# EAGLE board pickit_2 (EAGLE 5.11)
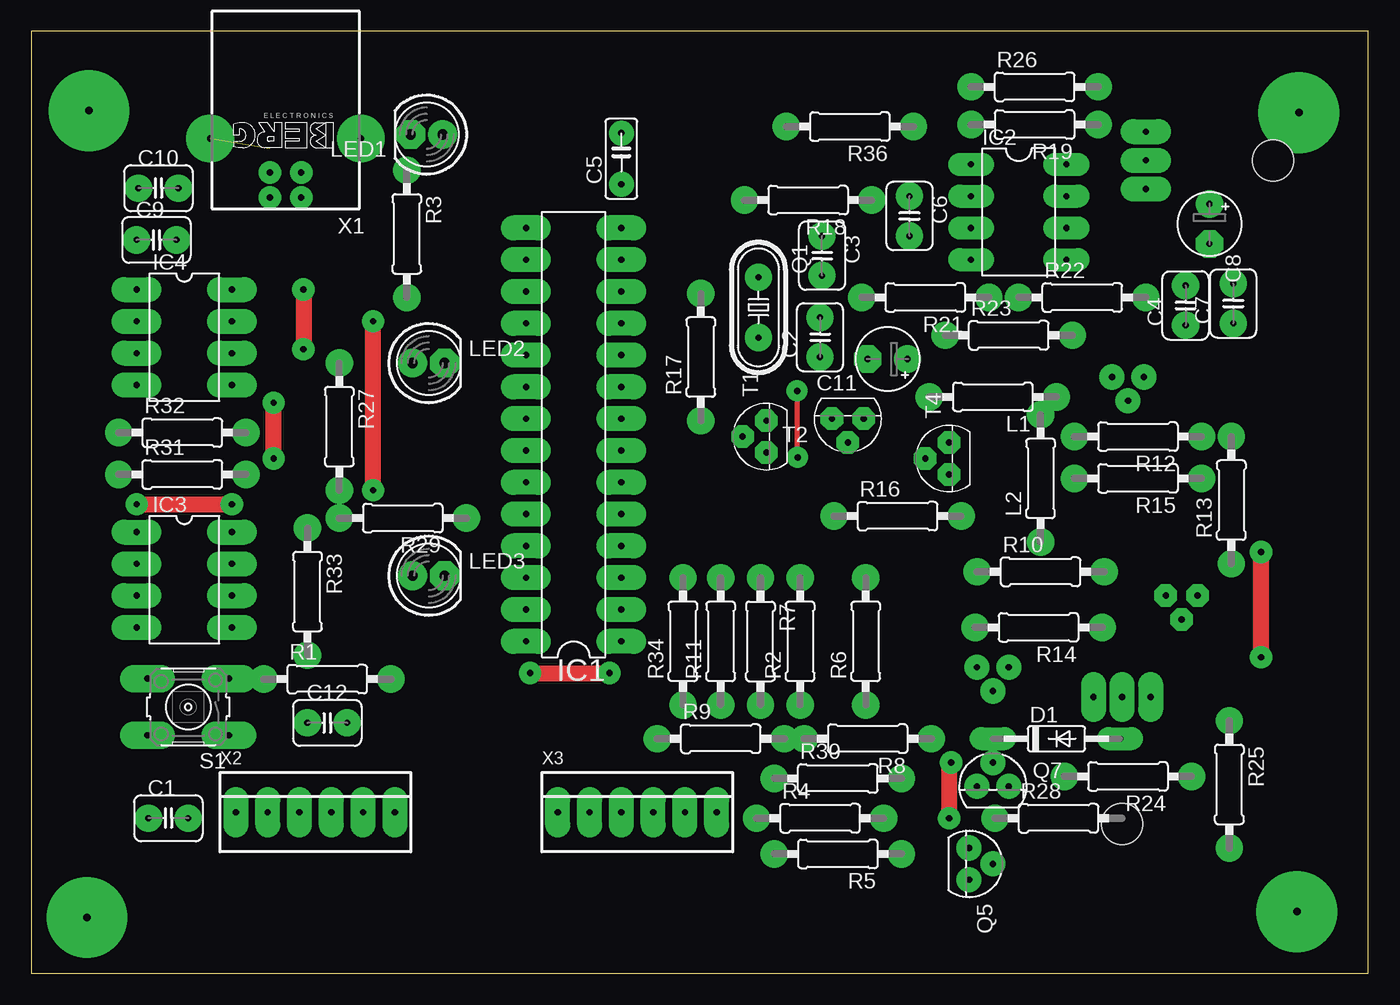
[diagram p0: board, top side]
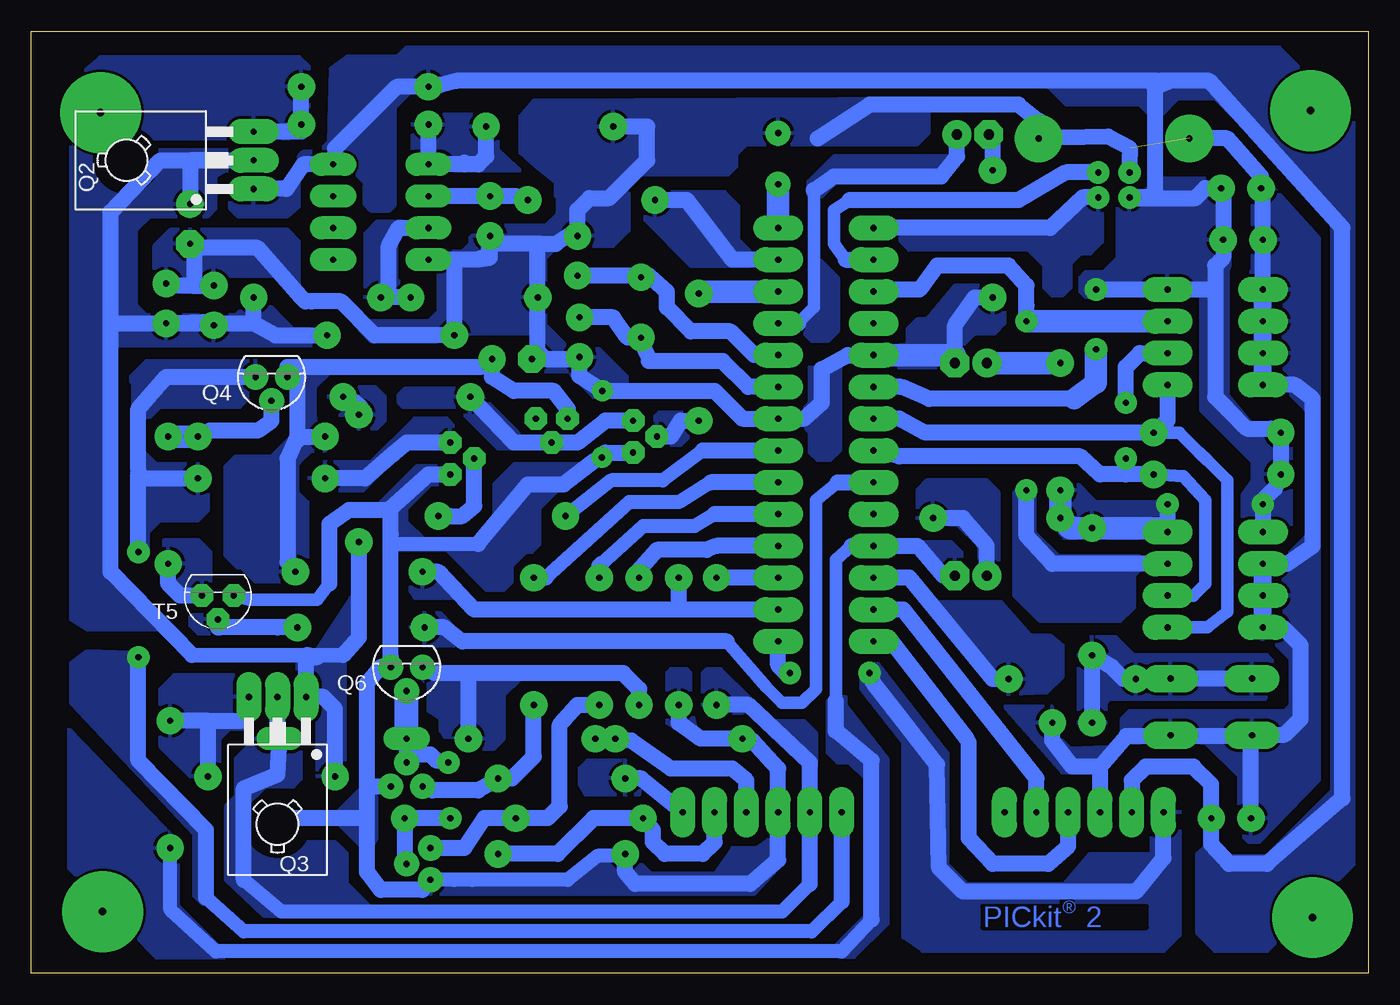
[diagram p1: board, bottom side, seen from below]

Size 106.83 x 75.24 mm. Coordinates in mm from the lower left corner, seen from the top.
Outline: 0,0 106.83,0 106.83,75.24 0,75.24 0,0
Copper layers (1*16): Top 0.035mm / dielectric 1.5mm / Bottom 0.035mm
Design rules "default": minimum track width 10mil, minimum drill 24mil, track to track 8mil, track to pad 8mil, pad to pad 8mil, via to via 8mil, smd to smd 8mil, copper to edge 40mil, drill to drill 8mil, minimum pad ring 10mil, minimum via ring 8mil, stop-mask expansion 4mil, vias tented up to drill 0mil, thermal gap 10mil

## Footprints (pad centres in the part's own frame; a part is rotated, then mirrored left to right if it is on the bottom)
C2.5-3 = drill 0.5 pad 2.184 round: 1 -1.587,0; 2 1.587,0
C5B2.5 = drill 0.5 pad 2 round: 1 -2.54,0; 2 1.54,0
E2,5-5 = drill 0.5 pad 2.184 round: + -1.587,0 | drill 0.5 pad 2.184 octagon: - 1.587,0
DO35-10 = drill 0.5 pad 1.85 long: A 5.08,0; C -5.08,0
DIL28-3 = drill 0.5 pad 2 long: 1 -16.51,-3.81; 2 -13.97,-3.81; 3 -11.43,-3.81; 4 -8.89,-3.81; 5 -6.35,-3.81; 6 -3.81,-3.81; 7 -1.27,-3.81; 8 1.27,-3.81; 9 3.81,-3.81; 10 6.35,-3.81; 11 8.89,-3.81; 12 11.43,-3.81; 13 13.97,-3.81; 14 16.51,-3.81; 15 16.51,3.81; 16 13.97,3.81; 17 11.43,3.81; 18 8.89,3.81; 19 6.35,3.81; 20 3.81,3.81; 21 1.27,3.81; 22 -1.27,3.81; 23 -3.81,3.81; 24 -6.35,3.81; 25 -8.89,3.81; 26 -11.43,3.81; 27 -13.97,3.81; 28 -16.51,3.81
DIL08 = drill 0.5 pad 1.85 long: 1 -3.81,-3.81; 2 -1.27,-3.81; 3 1.27,-3.81; 4 3.81,-3.81; 5 3.81,3.81; 6 1.27,3.81; 7 -1.27,3.81; 8 -3.81,3.81
DIL08' = drill 0.5 pad 2 long: 1 -3.81,-3.81; 2 -1.27,-3.81; 3 1.27,-3.81; 4 3.81,-3.81; 5 3.81,3.81; 6 1.27,3.81; 7 -1.27,3.81; 8 -3.81,3.81
0207/10 = drill 0.5 pad 2.184 round: 1 -5.08,0; 2 5.08,0
LED5MM = drill 0.813 pad 2.3 round: A -1.27,0 | drill 0.813 pad 2.3 octagon: K 1.27,0
HC49/S = drill 0.5 pad 2.184 round: 1 -2.413,0; 2 2.413,0
TO126 = drill 0.5 pad 2 long: 1 -2.286,-5.08; 2 0,-5.08; 3 2.286,-5.08 | hole 3.302: 0,5.08
TO92 = drill 0.5 pad 2 round: 1 1.27,0; 2 0,1.905; 3 -1.27,0
B3F-10XX = drill 0.5 pad 2.184 long: 1 -3.251,2.261; 2 3.251,2.261; 3 -3.251,-2.261; 4 3.251,-2.261
TO92' = drill 0.5 pad 1.8 octagon: 1 1.27,0; 2 0,1.905; 3 -1.27,0
PN61729-S = drill 0.5 pad 1.8 round: 1 1.25,4.71; 2 -1.25,4.71; 3 -1.25,2.71; 4 1.25,2.71 | drill 0.5 pad 3.81 round: S1 -6.02,0; S2 6.02,0
22-23-2061 = drill 0.5 pad 2 long: 1 -6.35,0; 2 -3.81,0; 3 -1.27,0; 4 1.27,0; 5 3.81,0; 6 6.35,0

## Placement (x,y rotation side)
C1  0.1uf  [C2.5-3]  10.95,12.38 0 top
C2  22pf  [C2.5-3]  63.02,50.8 90 top
C3  22pf  [C2.5-3]  63.18,57.31 270 top
C4  0.1uf  [C2.5-3]  92.23,53.34 90 top
C5  0.22uf or 0.47uf  [C5B2.5]  47.15,65.56 90 top
C6  0.1uf  [C2.5-3]  70.17,60.48 270 top
C7  0.1 uf  [C2.5-3]  96.04,53.5 90 top
C8  10uf  [E2,5-5]  94.14,59.85 270 top
C9  0.1uf  [C2.5-3]  10,58.58 0 top
C10  0.1uf  [C2.5-3]  10.16,62.71 0 top
C11  47uf  [E2,5-5]  68.42,49.05 180 top
C12  0.1uf  [C2.5-3]  23.65,20 0 top
D1  1N4148DO35-10  [DO35-10]  81.92,18.73 0 top
IC1  PIC18F2550_28DIP  [DIL28-3]  43.34,43.02 90 top
IC2  LM358N  [DIL08]  78.9,60.8 270 top
IC3  AT24CP  [DIL08']  12.22,31.43 270 top
IC4  AT24CP  [DIL08']  12.22,50.8 270 top
L1  330uh  [0207/10]  76.83,46.04 180 top
L2  330uh  [0207/10]  80.64,39.53 90 top
LED1  RED  [LED5MM]  31.59,66.99 180 top
LED2  GREEN  [LED5MM]  31.75,48.74 0 top
LED3  YELLOW  [LED5MM]  31.75,31.75 0 top
Q1  20mhz  [HC49/S]  58.1,53.18 270 top
Q2  BD140  [TO126]  94.14,64.93 90 bottom
Q3  BD140  [TO126]  87.15,16.99 180 bottom
Q4  2N3906  [TO92]  87.63,47.62 180 bottom
Q5  2N3906  [TO92]  74.93,8.73 270 top
Q6  2N3906  [TO92]  76.84,24.45 180 bottom
Q7  2N3906  [TO92]  76.83,14.92 0 top
R1  33R  [0207/10]  23.65,23.5 0 top
R2  10R  [0207/10]  61.44,26.51 90 top
R3  470R  [0207/10]  30,59.06 270 top
R4  33R  [0207/10]  63.02,12.38 0 top
R5  4.7k  [0207/10]  64.45,9.53 180 top
R6  10R  [0207/10]  66.67,26.51 90 top
R7  10R  [0207/10]  58.26,26.51 270 top
R8  33R  [0207/10]  66.83,18.73 180 top
R9  4.7K  [0207/10]  55.09,18.73 0 top
R10  8.2K  [0207/10]  80.65,32.07 0 top
R11  4.7K  [0207/10]  55.09,26.51 90 top
R12  100K  [0207/10]  88.42,42.86 180 top
R13  10K  [0207/10]  95.89,37.78 90 top
R14  10K  [0207/10]  80.49,27.62 180 top
R15  100R  [0207/10]  88.42,39.53 180 top
R16  10K  [0207/10]  69.22,36.51 0 top
R17  1K  [0207/10]  53.5,49.21 90 top
R18  10K  [0207/10]  62.07,61.75 180 top
R19  330R  [0207/10]  80.17,67.79 180 top
R21  100K  [0207/10]  71.44,53.98 180 top
R22  100K  [0207/10]  83.98,53.98 0 top
R23  100K  [0207/10]  78.11,50.96 0 top
R24  330R  [0207/10]  87.63,15.72 180 top
R25  1K  [0207/10]  95.73,15.08 270 top
R26  330R  [0207/10]  80.17,70.8 0 top
R27  470R  [0207/10]  24.61,43.66 270 top
R28  820R  [0207/10]  82.07,12.38 0 top
R29  470R  [0207/10]  29.69,36.35 180 top
R30  33R  [0207/10]  64.45,15.56 0 top
R31  2.7K  [0207/10]  12.06,39.85 0 top
R32  2.7K  [0207/10]  12.06,43.18 0 top
R33  10K  [0207/10]  22.07,30.48 270 top
R34  4.7K  [0207/10]  52.07,26.51 90 top
R36  240R  [0207/10]  65.41,67.63 180 top
S1  Program  [B3F-10XX]  12.54,21.27 180 top
T1  2N3904  [TO92']  58.74,42.86 90 top
T2  2N3904  [TO92']  65.25,44.29 180 top
T4  2N3904  [TO92']  73.34,41.12 90 top
T5  2N3904  [TO92']  91.92,30.16 180 bottom
X1  PN61729-S  [PN61729-S]  20.32,66.68 180 top
X2  ICSP  [22-23-2061]  22.7,12.86 0 top
X3  ICSP  [22-23-2061]  48.42,12.86 0 top

## Library data of the parts
C1-C7 C9 C10 C12 = capacitor-wima
C8 C11 L1 L2 R1-R19 R21-R34 R36 = rcl
D1 = diode
IC1 = microchip; MF: MICROCHIP; MPN: PIC18F2550-I/SP; OC_FARNELL: 1523822; OC_NEWARK: 80K6054
IC2 = linear
IC3 IC4 = atmel; MPN: AT24C1024BW-SH-B; OC_FARNELL: 1362646; OC_NEWARK: 03P2044
LED1-LED3 = led
Q1 = crystal; OC_FARNELL: 1667008; OC_NEWARK: unknown
Q2-Q7 = transistor-pnp
S1 = switch-omron; MPN: B3F-1000; OC_FARNELL: 176432; OC_NEWARK: 36M3542
T1 T2 T4 T5 = transistor
X1 = con-berg; OC_FARNELL: unknown; OC_NEWARK: unknown
X2 X3 = con-molex; MF: MOLEX; MPN: 22-23-2061; OC_FARNELL: 1462922; OC_NEWARK: 27C1933

## Nets
+3.3/5V_OUT: C4.1 C7.1 C8.+ L2.1 Q2.2 Q3.1 R22.2 R23.2 R24.2
+5V: C1.2 C9.2 C10.2 IC1.20 IC3.1 IC3.8 IC4.8 Q2.1 R26.1 R27.2 R29.2 R31.1 R32.1 R33.1 X1.1 X2.2
AUX: IC1.6 R6.2
AUX1: R30.1 X3.6
GND: C1.1 C2.1 C3.1 C4.2 C5.2 C6.2 C7.2 C8.- C9.1 C10.1 C11.- C12.2 IC1.8 IC1.19 IC3.2 IC3.3 IC3.4 IC4.1 IC4.2 IC4.3 IC4.4 LED2.K Q5.1 Q6.1 Q7.1 R3.2 R5.2 R9.1 R11.1 R21.2 R23.1 R28.2 R36.2 S1.1 S1.2 T1.3 T4.3 T5.3 X1.4 X1.S1 X1.S2 X2.3 X3.3
ICSPCLK: IC1.5 R2.2
ICSPCLK1: R4.1 R5.1 X3.5
ICSPDAT: IC1.4 R7.1
ICSPDAT1: R8.2 R9.2 X3.4
MCLR_TGT: IC1.7 R16.1
N$1: C2.2 IC1.9 Q1.2
N$2: C3.2 IC1.10 Q1.1
N$3: R17.1 T1.2
N$4: L1.2 T1.1 T2.2
N$5: C11.+ Q4.3 R10.2 R12.2 T2.1
N$6: C6.1 IC2.2 R18.1
N$7: LED1.K R3.1
N$8: Q4.2 R12.1 R13.2
N$9: IC2.1 R19.2 R36.1
N$10: R13.1 T5.1
N$11: R14.1 T5.2
N$12: Q2.3 R19.1 R26.2
N$13: R15.2 T4.1
N$14: R16.2 T4.2
N$15: L1.1 L2.2
N$16: C5.1 IC1.14
N$17: IC1.26 R1.2
N$18: C12.1 R1.1 R33.2 S1.3 S1.4
N$20: IC2.3 R21.1 R22.1
N$21: LED2.A R27.1
N$22: IC1.11 LED1.A
N$23: Q3.3 R24.1 R25.1
N$24: LED3.A R29.1
N$25: Q6.3 R7.2 R8.1
N$27: Q5.3 R2.1 R4.2
N$34: Q7.3 R6.1 R30.2
PGC: IC1.27 X2.5
PGD: IC1.28 X2.4
SCL: IC1.22 IC3.6 IC4.6 R31.2
SDA: IC1.21 IC3.5 IC4.5 R32.2
USB_D+: IC1.16 X1.3
USB_D-: IC1.15 X1.2
V+: IC2.8
V-: IC2.4
V_TGT: D1.A Q3.2 R34.1 X3.2
V_TGT_REF: D1.C Q5.2 Q6.2 Q7.2 R28.1
VDD_ADJ: IC1.13 R18.2
VDD_TGT_FB: IC1.3 R34.2
VPP: Q4.1 R15.1 X3.1
VPP1: IC1.1 X2.1
VPP_FB: IC1.2 R10.1 R11.2
VPP_ON: IC1.23 R14.2
VPP_PUMP: IC1.12 R17.2
VPP_TGT_P: IC1.25 LED3.K R25.2
WP: IC1.17 IC3.7 IC4.7

## Tracks (layer width: path | path; a pad name or v marks a point on that pad's centre or on a via)
+3.3/5V_OUT
  Bottom 1.15: 81.92,25.4 84.77,25.4 93.98,25.4
  Bottom 1.27: 82.23,15.72 82.07,15.56 R24.2 82.55,21.11 83.5,22.07 Q3.1 84.87,25.18 84.93,25.24 | 81.92,25.4 80.64,26.83 L2.1 | 89.06,51.91 91.76,51.91 96.2,51.91 | 100.49,51.91 97.63,51.91 96.2,51.91 | 93.98,25.4 100.49,32.07 100.49,51.91 | 84.93,25.24 83.98,25.24 84.77,25.4 84.93,25.24 | C8.+ 94.14,64.93 92.71,64.93 | R23.2 87.31,50.96 89.06,51.91 | 89.06,51.91 R22.2 | 96.2,51.91 C7.1 92.23,52.07 C4.1 | 92.71,64.93 96.52,64.93 100.49,60.8 100.49,51.91 | 92.71,64.93 88.42,64.93 | 92.71,64.93
  pour Bottom: 83.19,51.44 85.88,51.44 88.42,53.98 89.53,53.98 89.85,53.66 89.85,53.18 90.49,52.55 97.63,52.55 98.42,53.34 98.42,59.37 97.31,60.48 92.71,60.48 92.07,61.12 92.08,63.66 91.28,64.14 89.06,64.14 88.42,64.77 88.42,65.25 88.58,65.41 88.58,65.56 88.74,65.72 102.08,65.72 103.66,66.04 103.66,28.26 102.39,27.46 96.2,27.46 100.33,31.91 100.17,32.07 100.33,50.17 83.03,50.17 82.55,50.64
  pour Bottom: 81.76,15.88 81.76,25.56 82.39,25.72 84.93,25.72 85.57,25.08 85.57,22.23 83.98,20.64 83.98,15.72 83.19,14.92 82.55,14.92
  pour Bottom: 80.96,30 81.28,30 83.98,25.88 83.98,25.24 83.19,24.45 82.71,24.45 80.17,26.99 80.17,29.85 80.49,30.16
+5V  (via drill 0.5 pad 1.78)
  Top 1.27: v8.41,37.46 v16.03,37.46 | v21.75,54.61 v21.75,49.85
  Bottom 1.27: 16.35,35.56 IC3.8 v16.03,37.46 | 12.22,54.61 IC4.8 v21.75,54.61 | 12.22,54.61 12.22,46.04 11.27,45.08 9.68,43.5 7.78,43.5 R32.1 R31.1 7.46,38.73 8.41,37.78 v8.41,37.46 IC3.1 | IC1.20 37.31,46.83 35.08,45.88 23.5,45.88 | X2.2 18.89,15.4 17.78,16.51 13.97,16.51 12.54,15.08 C1.2 12.54,10.32 11.11,8.73 8.1,8.73 2.06,13.97 2.06,59.53 12.7,71.28 16.67,71.28 16.03,71.2 17.07,70.72 | 12.22,54.61 12.22,56.51 11.59,57.15 C9.2 11.59,62.55 C10.2 13.02,62.71 13.81,61.91 19.02,61.91 X1.1 17.07,61.96 17.07,70.72 | 17.07,70.72 16.91,71.28 16.83,71.12 16.83,71.28 72.87,71.28 74.14,70.96 74.45,70.96 R26.1 77.63,70.8 82.55,65.88 82.55,64.61 85.09,64.61 86.42,62.64 Q2.1 | R27.2
  Bottom 1.676: 21.75,47.15 23.5,45.88
  Bottom 1.778: 16.35,35.56 R33.1 23.81,35.56 R29.2 R27.2 | v21.75,49.85 21.75,47.94 21.75,47.15
  pour Bottom: 77.63,71.12 77.63,73.18 76.83,73.98 7.14,73.98 0.48,67.31 0.48,9.37 8.1,1.75 12.22,1.75 13.65,3.18 13.65,9.53 13.02,10.16 11.91,10.16 11.11,9.37 8.1,9.37 2.86,14.61 2.86,60.33 3.81,61.28 3.81,61.44 12.22,69.85 15.24,69.85 16.51,68.58 17.46,68.58 18.26,69.37 24.13,69.37 25.56,70.8 77.31,70.8
  pour Bottom: 16.83,63.5 11.91,63.5 11.11,62.71 11.11,56.52 11.27,56.04 11.27,46.2 9.37,43.97 7.14,43.97 6.19,43.02 6.19,35.72 7.3,34.61 9.53,34.61 10,35.08 10,38.26 9.21,39.37 9.21,40.8 13.34,44.93 13.34,55.09 13.65,55.09 20.16,55.09 21.27,53.98 22.54,53.98 23.02,54.45 23.02,55.56 22.54,56.04 21.11,56.04 20,57.15 20,61.6 19.21,62.39 17.94,62.39
  pour Bottom: 16.51,37.62 21.75,37.62 23.34,39.21 25.24,39.21 25.56,38.89 25.56,36.04 24.29,34.77 16.67,34.77 16.35,35.08 16.35,37.47
  pour Bottom: 76.83,73.18 81.6,73.18 82.87,72.23 83.03,66.36 83.82,65.56 85.09,65.56 85.41,65.25 85.41,64.29 85.25,64.14 81.92,64.14 81.76,63.98 80.96,63.98 80.17,63.18 80.17,61.44 79.69,60.96 78.26,60.96 77.79,61.44 77.79,69.22 76.68,70.33 76.68,73.03
  pour Bottom: 85.41,63.18 90.65,63.18 90.96,62.87 90.96,61.12 90.33,60.48 86.36,60.48 85.41,61.28
AUX
  Bottom 1.1: 52.55,39.21 55.09,37.62 59.05,37.62 65.72,31.59
  Bottom 1.27: IC1.6 52.55,39.21 | 65.72,31.59 66.52,31.59 R6.2
AUX1
  Bottom 1.27: X3.6 58.1,15.56 R30.1
  pour Bottom: 57.94,16.03 58.1,16.03 59.05,16.99 62.39,16.99 63.02,16.35 63.02,15.08 62.55,14.29 58.26,14.29 58.1,14.76
GND  (via drill 0.5 pad 1.68)  (1 unrouted)
  Top 0.406: v61.2,46.51 61.24,45.88 v61.24,41.2
  Bottom 0.406: v61.24,41.2 61.53,41.36 61.37,41.22
  Bottom 1.016: T5.3 89.38,29.85 83.98,29.85 83.03,31.11
  Bottom 1.1: 78.11,34.29 71.12,34.29 | Q5.1 73.03,7.46 71.6,7.46 63.98,7.46 61.59,9.37 59.37,9.37
  Bottom 1.27: 21.43,16.51 X2.3 | 21.43,16.51 19.33,18.93 15.88,18.93 S1.1 15.72,18.94 9.37,18.94 | LED2.K 33.02,49.37 33.02,51.75 31.43,53.97 R3.2 | IC4.4 5.87,46.99 4.45,45.88 4.45,34.13 6.51,32.7 IC3.2 | IC1.19 41.59,49.37 43.66,48.26 43.66,45.56 45.09,44.29 IC1.8 50.01,44.29 52.23,46.51 v61.2,46.51 63.03,47.71 C2.1 63.34,49.05 | X1.4 19.05,65.25 19.05,65.88 20.8,66.83 X1.S1 26.35,68.1 27.94,69.37 39.85,69.37 43.97,66.67 | R11.1 55.09,20 53.34,18.73 R9.1 49.21,18.57 47.15,16.35 X3.3 | Q5.1 75.56,6.67 78.9,6.67 80.01,8.1 80.01,10.16 | 80.01,10.16 80.01,12.22 | 80.01,12.22 80.01,12.54 80.01,14.92 | 80.01,14.92 Q7.1 | C1.1 9.37,18.94 | 9.37,18.94 S1.2 9.25,19.05 6.67,19.05 5.4,20.32 5.4,26.19 6.83,27.62 IC3.4 | 66.04,58.26 64.93,58.26 63.98,58.9 C3.1 63.18,60.96 62.23,61.91 60.64,61.91 57.63,64.93 | 66.04,58.26 70.17,58.26 C6.2 70.33,57.31 71.28,56.99 | 63.34,49.05 65.72,49.05 | 65.72,49.05 66.36,49.69 66.36,53.5 R21.2 66.36,58.26 66.04,58.26 | 73.03,56.99 73.03,56.2 R23.1 79.38,50.96 82.07,53.66 84.45,53.66 84.93,53.66 85.25,53.97 88.74,57.94 93.82,57.94 | 71.28,56.99 73.03,56.99 | 65.72,49.05 63.5,49.05 63.34,49.05 | 65.72,49.05 C11.- | T1.3 60.96,41.59 61.37,41.22 v61.24,41.2 61.91,40.88 62.23,40.64 64.29,39.05 67.15,39.05 71.12,34.29 | 78.11,36.99 78.11,37.15 75.09,39.85 74.14,39.85 T4.3 | 80.01,14.92 80.01,17.46 80.01,23.18 78.9,24.45 Q6.1 78.11,25.24 78.11,34.29 78.11,35.08 78.11,36.99 | 83.03,31.11 83.03,35.88 81.44,36.99 78.11,36.99 | 93.98,54.93 C4.2 | 93.98,54.93 95.89,54.93 C7.2 | 93.82,57.94 C8.- | 93.82,57.94 93.82,55.09 93.98,54.93 | X3.3 47.15,9.05 49.37,7.14 58.58,7.14 59.37,8.1 59.37,9.37 R5.2
  Bottom 1.27: X3.3 | C12.2 25.24,18.57 23.65,16.51 21.43,16.51 | 21.43,16.51 | IC4.1 C9.1 | C9.1 | C9.1 8.41,62.55 C10.1 8.57,63.66 11.27,66.67 X1.S2 | 80.01,10.16 | 70.17,58.26 70.17,57.15 71.28,56.99 | 73.03,56.99 75.09,56.99 | 75.09,56.99 75.25,56.99 | 75.09,56.99 | 75.09,56.99 | 57.63,67.63 R36.2 | 57.63,67.63 | 57.63,64.93 57.63,67.63 | 57.63,64.93 | R28.2 80.17,12.38 80.01,12.22 | T5.3
  Bottom 1.422: IC4.1 IC4.2 IC4.3 IC4.4 | IC3.2 IC3.3 IC3.4
  Bottom 1.778: IC1.19 33.02,49.37
  pour Bottom: 8.1,63.82 8.1,63.34 3.97,58.74 3.97,15.4 8.73,10.48 9.53,10.48 10.32,11.27 10.32,15.72 13.02,18.42 18.89,18.42 19.68,19.21 19.68,20.32 19.05,20.96 6.67,20.96 6.19,21.43 6.19,25.08 7.78,26.67 9.05,26.67 9.84,27.46 9.84,32.23 8.89,33.18 6.67,33.18 4.92,34.93 4.92,44.93 6.35,46.36 9.37,46.36 10,46.99 10,55.4 9.21,56.2 9.21,63.5 8.89,63.82
  pour Bottom: 31.59,54.93 33.02,54.93 35.24,52.23 36.04,52.23 36.83,51.44 36.83,50.32 36.99,50.17 39.21,50.17 39.53,49.85 39.53,48.74 39.21,48.42 33.5,48.42 32.38,49.53 32.38,50.17 31.43,51.12 29.84,51.12 29.05,51.91 29.05,53.82 29.69,54.93
  pour Bottom: 34.29,69.85 66.67,69.69 67.79,68.42 67.79,65.56 66.52,64.45 64.93,63.18 64.93,62.07 59.05,62.87 58.1,63.82 51.12,63.82 50.48,64.45 50.48,65.41 49.69,66.2 36.04,66.2 35.08,67.15 35.08,69.22 34.92,69.37 34.61,69.37 34.29,69.69
  pour Bottom: 20,18.1 23.81,17.94 25.24,19.37 25.24,21.27 29.05,21.27 28.89,21.11 24.45,16.03 21.59,16.03 19.68,17.94
  pour Bottom: 42.23,48.58 42.23,41.75 43.02,40.96 43.97,40.96 44.61,41.59 44.61,43.18 45.09,43.66 45.09,45.09 44.61,45.56 44.61,48.42 43.5,48.42 42.86,49.05
  pour Bottom: 47.94,11.43 47.94,10.64 48.9,10 50.8,10 52.23,7.94 57.31,7.94 58.74,9.37 62.23,9.37 63.82,7.78 75.56,7.78 75.72,6.35 49.05,6.35 46.67,8.89 46.67,11.59
  pour Bottom: 60.17,63.02 63.82,63.02 64.77,62.07 64.77,60.64 65.72,59.69 70.8,59.69 71.75,58.74 71.75,58.26 72.39,57.63 73.82,57.63 74.77,56.67 74.77,56.67 74.3,56.2 74.3,52.86 75.09,52.07 80.01,52.07 80.64,51.44 79.69,50.48 72.87,50.48 72.23,51.12 65.72,51.12 65.72,50.48 64.77,49.53 64.77,49.21 65.41,48.58 66.36,48.58 66.52,48.42 66.2,48.1 63.98,48.1 61.91,46.04 60.01,46.04 59.21,46.83 59.21,47.63 61.44,49.85 63.98,50.01 65.72,51.75 65.72,57.15 64.77,58.1 60.33,58.1 59.05,59.37 59.05,62.23 59.53,62.71
  pour Bottom: 62.87,40.64 68.26,40.64 69.85,39.05 69.85,36.2 71.44,34.61 75.41,34.61 76.83,36.04 76.83,37.15 74.93,39.05 73.5,39.05 73.03,39.53 73.03,40.32 73.18,40.48 76.04,40.48 78.9,37.62 78.9,37.15 78.58,36.83 78.58,34.77 77.63,33.81 73.66,33.81 70.48,30.64 69.06,30.64 68.42,31.27 68.42,32.54 67.31,33.66 66.83,33.66 66.2,34.29 66.2,37.15 64.77,38.58 64.29,38.58 63.34,39.53 62.55,40.32
  pour Bottom: 54.13,21.27 54.13,23.97 54.45,24.29 55.72,24.29 56.04,23.97 56.04,20 53.34,18.26
  pour Bottom: 85.41,54.77 85.41,58.42 86.36,59.37 95.73,59.37 97,58.1 97,54.77 96.68,54.45 92.08,54.45 90.81,55.72 86.84,55.72 86.04,54.93
  pour Bottom: 79.53,14.76 80.49,14.76 82.55,12.7 82.55,12.22 80.49,10.16 79.69,10 79.22,10.8 79.22,14.45
ICSPCLK
  Bottom 1.1: 52.23,36.67 53.82,35.72 57.94,35.72 61.28,32.7
  Bottom 1.27: IC1.5 52.23,36.67 | 61.28,32.7 61.44,32.54 R2.2
ICSPCLK1
  Bottom 1.27: X3.5 52.23,10.48 53.18,9.52 56.2,9.52 57.15,10.48 57.15,11.43 R4.1 61.91,12.38 64.77,9.52 69.22,9.52 R5.1
ICSPDAT
  Bottom 1.27: IC1.4 52.07,34.13 52.86,33.81 56.83,33.81 58.1,32.38 58.26,32.23 R7.1
ICSPDAT1
  Bottom 1.27: X3.4 49.69,15.4 50.8,16.35 55.72,16.35 58.9,18.57 R9.2 R8.2
MCLR_TGT
  Bottom 1.1: 53.18,41.75 56.36,39.37 60.48,39.37 R16.1
  Bottom 1.27: IC1.7 53.18,41.75
N$1
  Bottom 1.27: IC1.9 49.53,46.83 51.59,48.89 57.31,48.89 | 57.31,48.89 57.47,48.89 | 57.31,48.89 58.26,50.77 Q1.2 59.18,50.77 60.33,52.39 C2.2
N$2
  Bottom 1.27: IC1.10 49.05,49.37 50.96,51.28 54.13,51.28 56.04,53.18 56.04,54.45 57.47,55.72 58.45,55.72 Q1.1 58.1,55.72 C3.2
N$3
  Bottom 1.27: R17.1 54.93,44.13 55.72,42.86 T1.2
  pour Bottom: 53.82,44.77 56.67,44.77 56.99,44.45 56.99,42.86 56.36,42.23 54.93,42.23 53.66,43.5 53.66,44.61
N$4
  Bottom 1.27: T1.1 60.96,44.13 63.18,42.39 T2.2 68.26,42.39 L1.2 | L1.2 | L1.2
  pour Bottom: 71.12,46.67 76.99,46.67 77.47,46.2 77.47,45.56 77.15,45.24 71.28,45.24 71.12,45.4
  pour Bottom: 70.96,46.2 70.96,46.2 67.94,43.18 67.94,42.07 68.1,41.91 69.53,41.91 72.55,44.93
N$5
  Bottom 1.27: T2.1 63.98,45.08 65.09,46.51 68.26,46.51 70.01,47.62 70.01,48.74 | 85.57,42.86 R12.2 | 85.57,42.86 86.36,41.12 86.36,32.86 85.57,31.91 R10.2 | 70.01,48.74 69.85,48.74 C11.+ | 85.57,48.42 70.96,48.42 70.01,48.74 | 85.57,48.42 86.36,48.42 Q4.3 | 85.57,42.86 85.57,42.54 85.57,48.42
  pour Bottom: 85.57,38.42 84.77,37.62 84.77,31.91 85.41,31.27 88.9,31.27 90.01,32.39 90.33,32.39 91.28,33.34 91.28,40.48 90.49,41.28 86.04,41.28 85.57,40.8
  pour Bottom: 83.5,43.66 84.14,44.29 84.14,46.83 83.03,47.94 83.03,48.42 83.5,48.9 86.68,48.9 87,48.58 87,47.63 86.2,46.83 85.88,46.51 85.88,43.02 87.63,41.28 86.2,41.28 85.72,40.8 85.41,40.8 84.45,41.75 83.34,41.75 82.55,42.55 82.55,42.86 82.71,43.02
N$6
  Bottom 1.27: R18.1 68.1,62.07 69.06,62.07 C6.1 IC2.2
N$7
  Bottom 1.27: LED1.K 30,66.67 R3.1
N$8
  Bottom 1.27: Q4.2 87.63,44.13 88.74,43.34 92.55,43.34 R12.1
  Bottom 1.778: R12.1 95.09,42.86 R13.2
N$9
  Bottom 1.27: R19.2 IC2.1 72.23,64.61 | 72.23,64.61 72.23,64.77 | R36.1 70.48,65.25 71.12,64.61 72.23,64.61 | 72.23,64.61
  pour Bottom: 67.79,64.14 69.53,65.72 69.53,68.58 74.61,68.58 74.93,68.26 76.04,68.26 76.36,67.95 76.36,64.61 75.88,64.14 70.17,64.14
N$10
  Bottom 1.27: T5.1 94.93,30.16 95.89,31.11 R13.1
  pour Bottom: 96.2,34.61 93.5,34.61 92.55,33.66 92.55,30.16 92.87,29.85 95.25,29.85 96.36,30.96
N$11
  Bottom 1.27: R14.1 86.36,27.62 87.15,27.62 91.76,27.62 91.92,27.62 T5.2
  pour Bottom: 91.76,28.58 93.98,28.58 94.14,28.42 94.14,27.78 93.5,27.15 91.76,27.15 91.44,27.46
N$12
  Bottom 1.27: R26.2 85.25,67.47 R19.1 85.25,67.21 Q2.3
  pour Bottom: 84.61,67.79 84.61,72.39 85.41,73.18 101.28,73.18 102.55,72.07 102.55,68.1 102.55,67.31 102.55,66.68 85.72,66.68
N$13
  Bottom 1.27: T4.1 76.83,42.39 77.95,41.43 80.17,39.53 R15.2
  pour Bottom: 72.87,42.86 72.87,43.5 73.66,44.29 76.2,44.29 79.69,40.8 84.14,40.8 84.61,40.32 84.61,38.89 84.3,38.58 80.33,38.58 76.99,41.91
N$14
  Bottom 1.27: T4.2 71.44,37.31 72.39,36.51 73.34,36.51 R16.2
N$15
  Bottom 1.676: L2.2 80.64,45.08 L1.1
  pour Bottom: 81.76,46.83 79.38,46.83 78.58,46.04 78.58,44.13 79.22,43.5 81.12,43.5 83.03,45.4 83.03,46.51 82.71,46.83
N$16
  Bottom 1.778: IC1.14 C5.1
N$17
  Bottom 1.27: R1.2 30,23.49 36.67,31.59 IC1.26
  pour Bottom: 34.29,29.69 29.37,29.69 26.99,26.99 25.4,26.99 24.45,26.19 24.45,23.65 25.72,22.38 29.53,22.23 34.29,28.1
N$18
  Bottom 1.27: C12.1 22.07,24.61 R33.2 20.48,24.45 19.53,23.49 R1.1 18.54,23.53 S1.3 S1.4
  pour Bottom: 19.37,21.91 8.26,21.91 7.3,22.86 7.3,24.61 8.1,25.4 18.73,25.4 20.16,26.83 22.38,26.83 23.18,26.04 23.18,19.84 22.38,19.05 21.75,19.05 20.95,19.84 20.95,21.59 20.64,21.91
N$20
  Bottom 1.27: IC2.3 77.47,59.53 78.26,58.1 78.26,53.97 | R21.1 78.26,53.97 | 78.26,53.97 R22.1
  pour Bottom: 76.52,60.01 79.22,60.01 80.17,59.06 80.17,53.98 79.85,53.66 76.2,53.66 75.72,54.13 76.36,54.13 77.63,55.4 77.63,58.58 77.15,59.06 76.68,59.06 76.52,59.21
N$21
  Bottom 1.778: R27.1 LED2.A
N$22
  Bottom 1.016: 44.29,62.55 44.29,53.18 45.56,51.91
  Bottom 1.27: LED1.A 32.86,65.25 34.13,63.66 42.7,63.66 44.29,62.55 | 45.56,51.91 IC1.11
  pour Bottom: 33.02,65.25 42.7,65.25 44.77,63.18 44.77,62.23 44.61,62.07 43.66,62.07 42.55,63.18 34.13,63.18 32.38,65.09 32.38,65.56 32.86,65.56 32.86,65.41
  pour Bottom: 43.81,56.99 42.39,55.56 42.39,51.28 43.18,50.48 44.45,50.48 45.24,51.28 45.24,52.71 44.61,53.34 44.61,56.52 44.29,56.83
N$23
  Bottom 1.27: 92.71,20.16 R25.1 | R24.1 92.71,20.16 | Q3.3 89.44,20.89 90.17,20.16 92.71,20.16
  pour Bottom: 89.53,23.81 95.41,23.81 96.52,22.7 96.52,18.1 93.66,15.24 92.23,15.24 91.76,15.72 91.76,18.73 90.96,19.53 90.01,19.53 89.06,20.48 89.06,23.5 89.38,23.81
N$24
  Bottom 1.27: LED3.A 30.48,34.13 32.38,36.35 R29.1
  pour Bottom: 30.16,31.91 29.84,31.91 29.53,32.23 29.53,38.42 30.48,39.37 35.24,39.37 36.04,38.58 36.04,36.35 35.56,35.88 32.86,35.88 31.11,34.13 31.11,32.07 30.96,31.91
N$25
  Bottom 1.27: R7.2 58.26,22.7 59.53,23.97 71.91,23.97 | 71.91,23.97 74.61,23.97 75.56,24.29 75.56,24.13 Q6.3 | 71.91,23.97 R8.1
  pour Bottom: 71.75,17.94 69.85,17.94 69.06,18.73 69.06,22.23 67.79,23.5 67.79,24.13 68.1,24.45 75.25,24.45 75.72,23.97 75.72,23.65 75.09,23.02 75.09,20.96 74.14,20.32 74.14,19.37 73.82,18.89 72.23,18.89
N$27
  Bottom 1.27: Q5.3 72.23,10 70.64,12.38 R4.2 65.56,12.38 64.61,13.33 64.61,19.84 63.18,21.43 R2.1
N$31
  pour Bottom: 42.86,49.05 42.23,49.05
N$34
  Bottom 1.27: Q7.3 75.41,14.92 74.77,14.6 71.12,14.6 69.69,15.4 R30.2 69.85,15.56 68.42,15.56 66.67,17.3 R6.1
PGC
  Bottom 1.27: X2.5 26.51,15.56 37.15,29.05 IC1.27
PGD
  Bottom 1.27: X2.4 23.97,10.16 25.56,8.73 30,8.73 31.91,10.79 31.91,15.56 31.91,18.41 32.07,18.73 38.1,26.51 IC1.28
S$1  (via drill 0.6 pad 6.45)
  other vias: 4.45,4.45
S$2  (via drill 0.6 pad 6.45)
  other vias: 4.6,68.9
S$3  (via drill 0.6 pad 6.45)
  other vias: 101.12,4.92
S$4  (via drill 0.6 pad 6.45)
  other vias: 101.28,68.74
SCL  (via drill 0.5 pad 1.78)
  Top 1.27: v19.37,41.12 v19.37,45.56
  Bottom 1.016: IC3.6 13.97,30.16 13.02,31.11 13.02,37.78 14.76,39.69 R31.2
  Bottom 1.27: R31.2 19.37,39.85 | 19.37,39.85 21.43,39.85 23.02,41.27 37.47,41.27 IC1.22 | 15.08,49.53 IC4.6 18.26,49.53 19.37,48.42 v19.37,45.56 | 19.37,39.85 v19.37,41.12
SDA
  Bottom 1.016: 16.03,43.18 15.08,43.18 13.49,41.59 12.86,40.96 11.27,39.37 11.27,28.89 12.86,27.62 IC3.5 | 16.03,43.18 16.99,43.18 | 16.03,43.18 IC4.5
  Bottom 1.27: IC4.5 16.03,44.13 R32.2 35.4,43.18 37.47,44.29 IC1.21
USB_D+
  Bottom 1.016: 41.43,61.75 42.7,60.96 42.7,58.26 41.75,56.99
  Bottom 1.27: X1.3 24.14,63.96 27.94,61.75 41.43,61.75 | 41.75,56.99 IC1.16
USB_D-
  Bottom 1.27: X1.2 22.81,61.96 25.4,59.53 IC1.15
  pour Bottom: 21.27,61.91 21.27,58.42 22.23,57.47 23.02,57.47 23.81,56.67 23.81,54.77 24.45,54.13 25.24,54.13 25.88,54.77 25.88,56.52 27.15,57.79 36.67,57.79 37.62,58.74 40.16,58.74 40.8,59.37 40.8,60.17 40.64,60.33 38.89,60.33 38.58,60.01 25.4,60.01 23.34,62.07 21.43,62.07
V_TGT
  Bottom 1.1: 89.85,7.46 86.84,4.92 46.83,4.92 44.61,7.14
  Bottom 1.27: R34.1 49.53,21.43 44.61,16.83 X3.2 44.61,7.14 | 89.85,7.46 89.85,14.76 87.15,15.87 D1.A 87.15,18.41 Q3.2
  pour Bottom: 44.45,16.99 44.93,16.99 46.99,19.05
  pour Bottom: 47.47,20.16 45.09,20.16 44.13,19.21 44.13,16.51 44.29,16.35 44.45,16.35 47.31,19.21
  pour Bottom: 49.37,21.91 51.75,24.29 52.86,24.29 53.18,23.97 53.18,21.27 52.7,20.8 50.01,20.8 49.85,20.96
  pour Bottom: 79.85,5.4 81.6,7.14 81.6,9.53 82.55,10.48 89.22,10.48 89.22,13.81 88.11,14.92 85.88,14.92 85.25,15.56 85.25,19.05 85.72,19.53 88.11,19.53 90.49,17.15 90.49,14.13 91.28,13.34 91.28,7.46 88.27,4.6 80.17,4.6 79.69,4.92
V_TGT_REF  (via drill 0.5 pad 1.78)
  Top 1.27: v73.34,12.38 73.34,16.83 v73.5,16.83
  Bottom 1.27: Q7.2 D1.C 76.68,17.46 74.93,17.46 74.45,16.99 v73.5,16.83 | Q5.2 76.99,9.52 R28.1 v73.34,12.38
  Bottom 1.93: D1.C Q6.2
VDD_ADJ
  Bottom 1.27: IC1.13 50.8,56.99 54.45,61.75 R18.2
  pour Bottom: 48.58,57.47 49.21,57.47 50.32,58.58 50.32,61.28 51.44,62.39 57.47,62.39 57.78,62.07 57.78,60.17 54.13,56.52 48.9,56.52 48.74,56.67
VDD_TGT_FB
  Bottom 1.27: IC1.3 49.85,31.59 R34.2
VPP  (via drill 0.5 pad 1.78)
  Top 1.27: v98.27,25.24 v98.27,33.65
  Bottom 1.1: 42.07,5.71 44.45,3.33 89.85,3.33 92.87,6.03
  Bottom 1.27: Q4.1 96.04,47.62 98.27,45.08 98.27,40.16 98.19,39.78 | 98.19,39.78 97.79,39.53 94.61,39.53 R15.1 | 42.07,5.71 X3.1 | 92.87,6.03 92.87,11.43 98.27,16.99 v98.27,25.24 | v98.27,33.65 98.27,39.86 98.19,39.78
  pour Bottom: 88.27,48.1 88.27,48.42 88.74,48.9 97.63,48.9 98.9,47.63 98.9,47.31 98.74,47.15 98.74,33.5 98.27,33.02 97.95,33.02 97.47,33.5 97.47,35.24 96.52,36.2 93.5,36.2 92.71,36.99 92.71,40.01 93.34,40.64 96.84,40.64 97.47,41.28 97.79,41.59 97.79,44.29 97.63,44.45 97.31,44.45 96.52,45.24 90.17,45.24 89.53,45.88 89.53,46.99 89.38,47.15
  pour Bottom: 97.63,25.56 102.39,25.72 103.66,24.77 103.66,21.59 93.82,11.11 93.82,6.19 93.19,5.56 92.71,5.56 92.39,5.87 92.39,11.43 97.79,16.83 97.79,25.08 97.95,25.24
VPP1  (via drill 0.5 pad 1.78)
  Top 1.27: v39.85,23.97 v46.2,23.97
  Bottom 1.27: X2.1 16.35,9.21 18.57,6.51 32.38,6.51 34.29,8.41 34.45,16.67 37.94,21.11 39.53,23.18 v39.85,23.97 | v46.2,23.97 46.51,23.97 47.15,24.61 IC1.1
  pour Bottom: 16.51,14.13 15.56,14.13 15.08,13.65 15.08,3.02 16.35,1.75 35.56,1.75 37.15,2.86 37.15,18.42 40.48,22.7 40.48,24.13 40.01,24.61 39.21,24.77 33.65,17.62 33.66,8.73 32.07,7.14 24.29,7.14 22.22,9.53 17.3,9.53 17.3,13.34
VPP_FB
  Bottom 1.27: IC1.2 55.09,29.05 | 55.09,29.05 71.44,29.05 74.3,32.07 | 74.3,32.07 | 74.3,32.07 R10.1 | 55.09,29.05 R11.2
  pour Bottom: 74.3,32.54 75.88,32.54 76.52,31.91 76.52,30.48 76.2,30 71.91,30
VPP_ON
  Bottom 1.016: 42.39,39.21 44.13,37.78 44.13,22.7 45.24,21.59 46.83,21.59 48.1,22.86 51.28,26.51
  Bottom 1.27: 42.39,39.21 IC1.23 | 51.28,26.51 72.39,26.51 73.82,27.62 R14.2
  pour Bottom: 73.18,27.78 74.14,28.73 76.04,28.73 76.52,28.26 76.52,26.51 76.2,26.19 73.03,26.19
VPP_PUMP
  Bottom 1.778: IC1.12 53.18,54.45 R17.2
VPP_TGT_P
  Bottom 1.016: 41.27,34.13 42.55,33.02 42.55,21.75
  Bottom 1.1: 39.69,4.29 42.07,1.75 92.08,1.75 95.73,5.08 R25.2
  Bottom 1.27: LED3.K 33.97,31.75 36.04,34.13 IC1.25 41.27,34.13 | 42.55,21.75 42.55,19.37 39.69,16.99 | 39.69,16.99 | 39.69,4.29 39.69,16.99
  pour Bottom: 35.56,34.45 33.34,34.45 32.54,33.66 32.54,31.27 32.86,30.96 33.34,30.96 36.04,33.66
  pour Bottom: 41.75,22.07 41.75,21.43 38.42,17.15 38.42,3.97 41.12,1.27 42.23,1.27 42.7,1.75 42.7,2.06 40.16,4.6 40.16,15.56 41.43,16.83 42.39,16.83 43.18,17.62 43.18,21.75 42.7,22.23
  pour Bottom: 95.25,10.48 95.25,10.64 103.82,19.53 103.82,8.41 96.84,1.27 91.44,1.27 91.44,1.75 95.09,5.4 95.09,10
WP  (via drill 0.5 pad 1.78)
  Top 1.27: v27.3,38.58 v27.3,52.07
  Bottom 1.27: IC3.7 25.24,32.7 27.3,34.92 v27.3,38.58 | v27.3,52.07 27.3,53.34 27.3,54.93 28.73,56.51 34.45,56.51 35.88,54.61 39.37,54.61 IC1.17
  Bottom 1.778: v27.3,52.07 IC4.7
  pour Bottom: 17.46,32.39 18.1,32.39 18.73,31.75 18.73,29.21 19.84,28.1 26.19,28.1 28.26,30.16 28.26,38.42 27.62,39.05 26.83,39.05 26.67,38.89 26.67,35.24 24.77,33.34 17.78,33.34 17.46,33.02 17.46,32.54 17.3,32.39

## Text on the board
Bottom: ® | PICkit 2